# Altium PCB DRF1605_KIT.PcbDoc
Units mm, origin at the board's own origin, x right, y up, seen from the top; angles counter-clockwise.
Board outline 83 x 53 mm, 2 copper layers (Top Layer, Bottom Layer); 42 components, 37 nets, 220 pads, 27 vias.
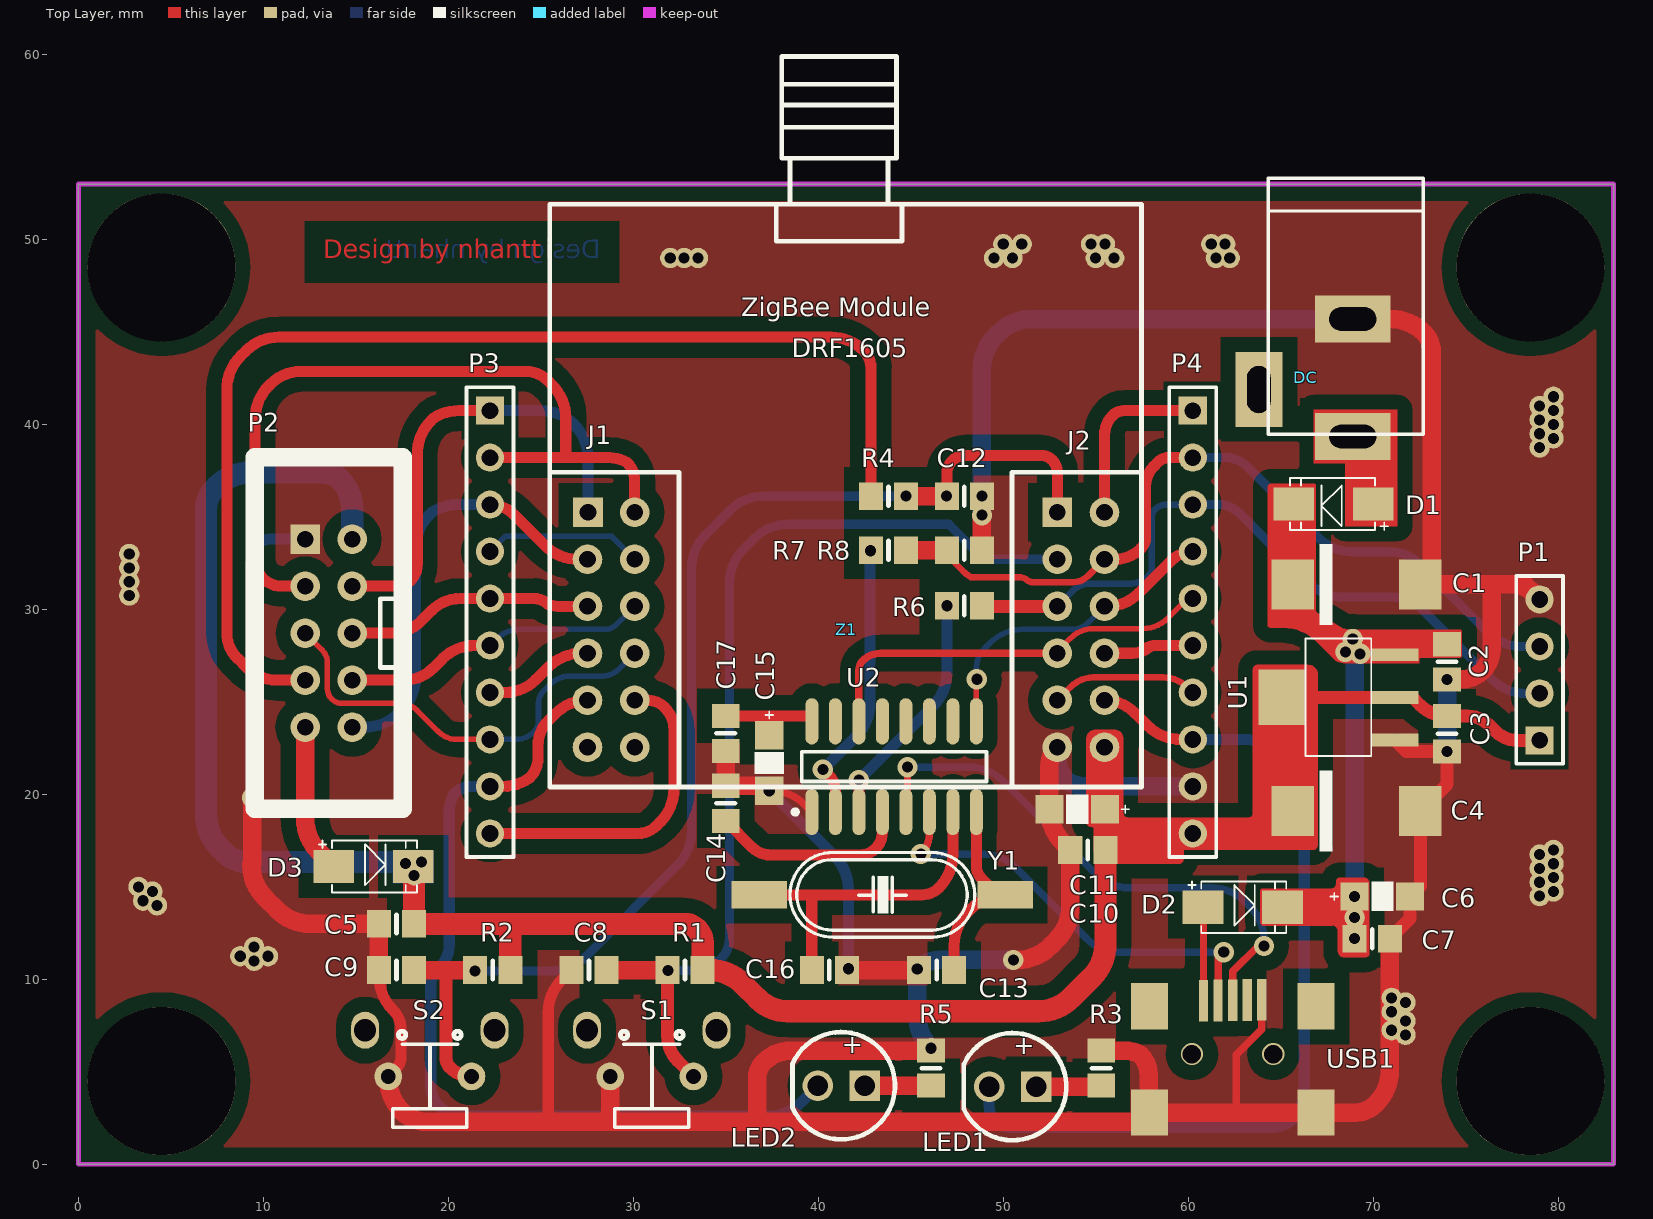
[diagram p0: Top Layer view]
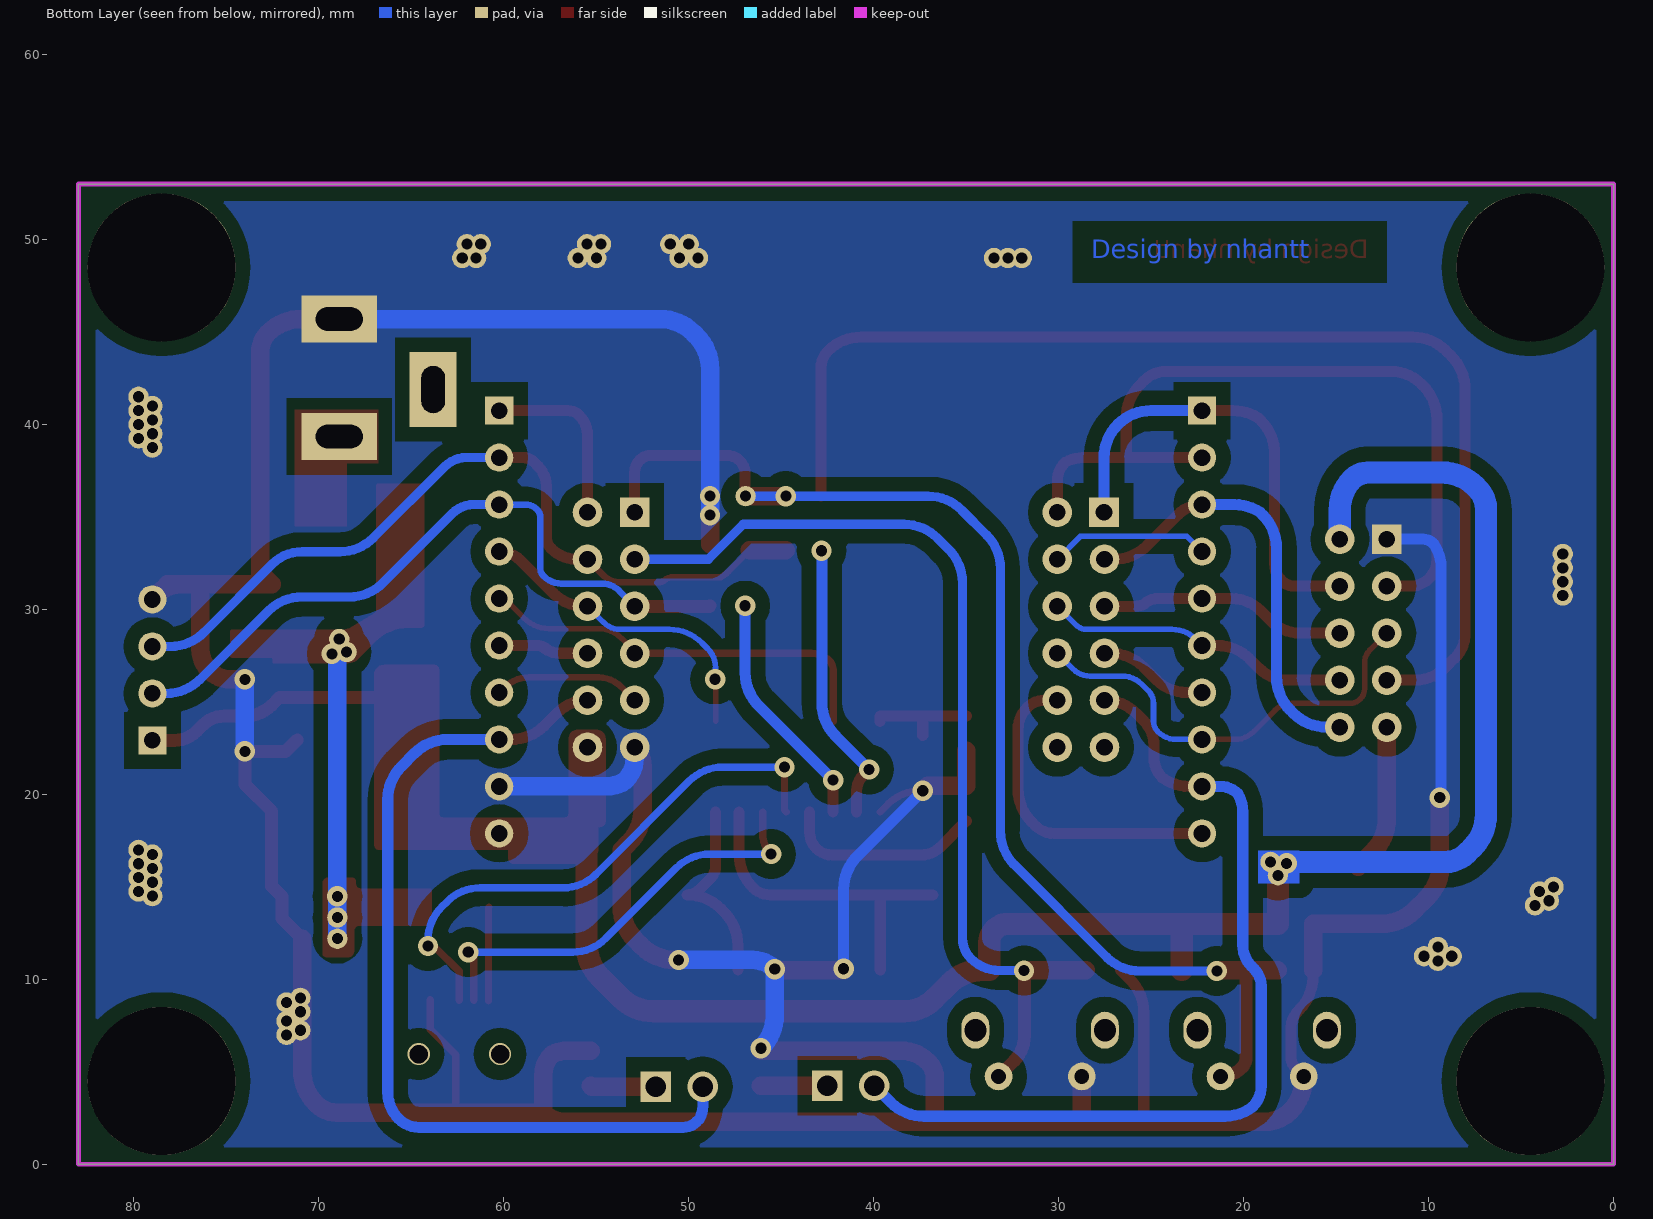
[diagram p1: Bottom Layer view, seen from below]

## Layer stack, top to bottom
Top Solder: solder mask 0.0102, Solder Resist, Dk 3.5
Top Layer: signal copper 0.0356
Dielectric 1: dielectric 0.32, FR-4, Dk 4.8
Bottom Layer: signal copper 0.0356
Bottom Solder: solder mask 0.0102, Solder Resist, Dk 3.5

## Board outline
0,0 83,0 83,53 0,53 0,0

## Design rules (kind name [scope] priority, off if disabled: settings)
Clearance Clearance_1 [InPolygon] p1: gap=0.8
Clearance [All] p2: gap=0.254
PolygonConnect [All] p1: connectstyle=Direct reliefconductorwidth=0.254 reliefentries=4 polygonreliefangle="90 Angle" airgapwidth=0.254
RoomDefinition DRF1605_KIT [InComponentClass('DRF1605_KIT')] p1: confinementstyle=ConfineIn formatcopy=TRUE lockcomponents=FALSE outline 85,3 314,3 314,47 85,47
RoutingVias [All] p1: holewidth=0.6 width=1.1 viastyle="Through Hole" minholewidth=0.6 minwidth=1.1 maxholewidth=0.6 maxwidth=1.1
SolderMaskExpansion [All] p1: expansion=0.102
Width [All] p1: maxlimit=2 minlimit=0.254 preferedwidth=0.7
30 further rules are at their usual default settings.

## Components (designator, comment, footprint, x,y, rotation, side; value= is the part's Value field where it differs from the comment)
C1 "Cap Pol3" "CAP TANTALUM 7343" 69.1,31.35 r0 top
C2 "100nF-16V-20%" C0805 74,27.169 r90 top
C3 "100nF-16V-20%" C0805 74,23.281 r90 top
C4 "220u, 16v" "CAP TANTALUM 7343" 69.1,19.1 r0 top
C5 "100nF" C0805 17.2,13 r0 top
C6 "10uF/50V" C1206 69.1,14.486 r0 top
C7 "100nF-16V-20%" C0805 69.95,12.2 r180 top
C8 "100nF-16V-20%" C0805 27.6,10.5 r0 top
C9 "100nF-16V-20%" C0805 17.2,10.5 r0 top
C10 "100nF" C0805 54.575,17 r0 top
C11 "10uF/50V" C1206 55.4,19.2 r180 top
C12 "1nF" C0805 47.9,36.125 r180 top
C13 "22p" C0805 46.4,10.5 r180 top
C14 "100nF" C0805 35,19.517 r270 top
C15 "10uF/50V" C1206 37.35,23.1 r270 top
C16 "22p" C0805 40.6,10.5 r0 top
C17 "100nF" C0805 35,23.3 r90 top
D1 "SS14" "DO-214AC (SMA)" 69.1,35.2 r180 top
D2 "SS14" "DO-214AC (SMA)" 61.703,14.4 r0 top
D3 "SS14" "DO-214AC (SMA)" 14.7,16.6 r0 top
DC "Jac DC" DC-IN 66.36,42.525 r270 top (schematic designator JDC1)
LED1 "Footprint" LedBlue5 50.512,4.2 r180 top
LED2 "Footprint" LedRed5 41.25,4.25 r180 top
P1 "Header 4" HDR1X4 79,22.92 r90 top
P2 "CABLE 10" "CABLE 10" 12.26,33.8 r270 top
P3 "Header 10" HDR1X10 22.25,40.75 r270 top
P4 "Header 10" HDR1X10 60.25,40.75 r270 top
R1 "10k" R0805 32.8,10.5 r180 top
R2 "10k" R0805 22.4,10.5 r180 top
R3 "1k" R0805 55.3,5.2 r90 top
R4 "10k" R0805 43.8,36.125 r180 top
R5 "1k" R0805 46.1,5.2 r90 top
R6 "470" R0805 47.9,30.2 r0 top
R7 "4k7" R0805 43.8,33.2 r0 top
R8 "10k" R0805 47.9,33.2 r180 top
S1 "SW-SMD" "Button Tactile Switch" 31,6 r0 top
S2 "SW-SMD" "Button Tactile Switch" 19,6 r0 top
U1 "LM1117-3.3V" LM1117-SOP 69.9,25.25 r90 top
U2 "CH340G" SOP-16 44.1,21.5 r90 top locked
USB1 "USB_M" USB_B_MINI_SMD 60.829,8.845 r180 top
Y1 "12MHz" "XT2 SMD" 43.5,14.568 r0 top
Z1 "ZigbeeDRF1605" DRF1605 41.5,28.9 r90 top locked

## Footprints (in the part's own frame and the unit in brackets; to place one, negate y for a bottom-side part, rotate by r counter-clockwise, add the part's x,y. Pads: shape width x height; smd on the part's side, far side on the other; paste and mask are expansions set on the pad)
"Button Tactile Switch" [mm]
  oval 1.5x2 hole 1.2: 0(-3.5,1.25) 0(3.5,1.25)
  round 1.5 hole 0.8: 1(-2.25,-1.25) 2(2.25,-1.25)
  silkscreen extent -2,-4 2,1.2, body extent -4.25,-4.85 4.25,3.05, height 7.4
C0805 [mm] "Chip Capacitor; Body 2.0 x 1.2 mm (LxW typ)"
  rect 1.3x1.5 smd: 1(0.95,0) 2(-0.95,0)
  silkscreen extent 0,-0.5 0,0.5, body extent -1.02,-0.64 0.98,0.62, height 0.78
C1206 [mil]
  rect 60x60 smd: 1(-3.93,0) 2(114.18,0)
  silkscreen extent -55,-31 79,31, body extent -8,-31 118,31, height 63
"CABLE 10" [mm] "Connector; Header; 5x2 Position"
  rect 1.6x1.6 hole 0.9: 1(0,0)
  round 1.6 hole 0.9: 2(0,2.54) 3(2.54,0) 4(2.54,2.54) 5(5.08,0) 6(5.08,2.54) 7(7.62,0) 8(7.62,2.54) 9(10.16,0) 10(10.16,2.54)
  silkscreen extent -4.42,-2.73 14.58,5.27, body extent -5.08,-3.3 15.24,5.84, height 9.86
"CAP TANTALUM 7343" [mm]
  rect 2.3x2.7 smd: 1(-3.45,0) 2(3.45,0)
  silkscreen extent -2,-2.2 -1.3,2.2, body extent -3.7,-2.22 3.7,2.22, height 3.01
DC-IN [mil] "Jac DC input"
  rect 100x160 hole 50 slot 100 at 90 deg: 1(125,100) 2(-125,100)
  rect 160x100 hole 50 slot 100 at 0 deg: 3(25,-100)
  silkscreen extent -425,-80 120,250, body extent -410,-105 134,269, height 434
"DO-214AC (SMA)" [mm]
  rect 2.2x1.8 smd: 1(-0.899,-0.5) 2(3.397,-0.5)
  silkscreen extent -1.7,-1.9 3.6,0.9, body extent -1.3,-1.8 3.9,0.8, height 2.3
DRF1605 [mm]
  rect 1.6x1.6 hole 0.9: 1(6.35,13.95) 13(6.35,-11.425)
  round 1.6 hole 0.9: 2(6.35,11.425) 3(3.81,13.975) 4(3.81,11.425) 5(1.27,13.975) 6(1.27,11.425) 7(-1.27,13.975) 8(-1.27,11.425) 9(-3.81,13.975) 10(-3.81,11.425) 11(-6.35,13.975) 12(-6.35,11.425) 14(6.35,-13.975) 15(3.81,-11.425) 16(3.81,-13.975) 17(1.27,-11.425) 18(1.27,-13.975) 19(-1.27,-11.425) 20(-1.27,-13.975) 21(-3.81,-11.425) 22(-3.81,-13.975) 23(-6.35,-11.425) 24(-6.35,-13.975)
  silkscreen extent -8.5,-15.97 31,16.02, body extent -7.87,-15.24 7.87,15.24, height 8.5
HDR1X4 [mil] "Connector; Header; 4 Position"
  rect 60x60 hole 35.43: 1(0,0)
  round 60 hole 35.43: 2(100,0) 3(200,0) 4(300,0)
  silkscreen extent -50,-50 350,50, body extent -50,-50 350,50, height 345
HDR1X10 [mil] "Connector; Header; 10 Position"
  rect 60x60 hole 35.43: 1(0,0)
  round 60 hole 35.43: 2(100,0) 3(200,0) 4(300,0) 5(400,0) 6(500,0) 7(600,0) 8(700,0) 9(800,0) 10(900,0)
  silkscreen extent -50,-50 950,50, body extent -50,-50 950,50, height 336
LedBlue5 [mil] "LedBlue5mm"
  rect 65x65 hole 43.31: 1(-50,0)
  round 65 hole 43.31: 2(50,0)
  silkscreen extent -114,-114 104,114, body extent -117,-118 96,119, height 347
LedRed5 [mil] "LedRed5mm"
  rect 65x65 hole 43.31: 1(-50,0)
  round 65 hole 43.31: 2(50,0)
  silkscreen extent -114,-114 104,114, body extent -118,-118 98,118, height 335
LM1117-SOP [mm]
  rect 0.7x2.54 smd: 1(-2.3,-1.27) 2(0,-1.27) 3(2.3,-1.27)
  rect 3x2.54 smd: 2(0,4.826)
  silkscreen extent -3.18,0 3.17,3.56, body extent -3.25,-1.78 3.25,5.18, height 1.68
R0805 [mm] "Chip Resistor; Body 2.0 x 1.2 mm (LxW typ)"
  rect 1.3x1.5 smd: 1(0.95,0) 2(-0.95,0)
  silkscreen extent 0,-0.5 0,0.5, body extent -1,-0.65 1,0.6, height 0.78
SOP-16 [mm] "16-Pin Small Outline Integrated Circuit 1.27 mm Pitch, IPC Low Density"
  oval 2.5x0.7 smd: 1(-2.45,4.445) 2(-2.45,3.175) 3(-2.45,1.905) 4(-2.45,0.635) 5(-2.45,-0.635) 6(-2.45,-1.905) 7(-2.45,-3.175) 8(-2.45,-4.445) 9(2.45,-4.445) 10(2.45,-3.175) 11(2.45,-1.905) 12(2.45,-0.635) 13(2.45,0.635) 14(2.45,1.905) 15(2.45,3.175) 16(2.45,4.445)
  silkscreen extent -2.57,-5 0.8,5.47, body extent -2.95,-5 2.96,4.98, height 1.45
USB_B_MINI_SMD [mm]
  rect 2x2.5 smd: 0(-6.075,0.305) 0(-6.071,6.045) 0(2.925,0.305) 0(2.929,6.045)
  rect 0.5x2.25 smd: 1(0,0) 2(-0.787,-0.013) 3(-1.575,-0.025) 4(-2.362,-0.038) 5(-3.15,-0.051)
  body extent -6.92,-0.37 3.78,8.83, height 3.95
"XT2 SMD" [mm] "Footpin for Crystal 2 pin"
  rect 3x1.5 smd: 1(-6.7,0) 2(6.6,0)
  silkscreen extent -5.03,-2.29 4.96,2.29, body extent -5.93,-2.36 5.42,2.29, height 3.5

## Part data
C1: "Polarized Capacitor (Surface Mount)"
C2 C3 C5 C7 C8 C9 C10 C12 C14 C17: library part Cap, "CAP CER 0.1UF 16V Y5V 0603"
C4: library part "Cap Pol3", "Polarized Capacitor (Surface Mount)"
C6 C11 C15: library part "Cap Semi", "Capacitor 100n 16V 0603"
C13 C16: library part "Cap Semi", "Capacitor (Semiconductor SIM Model)"
D1 D2 D3: library part "D Schottky", "Schottky Diode"
DC: library part DCIN, "Jac DC input"
LED1 LED2: library part Led, "LED"
P1: "Header, 4-Pin"
P2: "Header, 5-Pin, Dual row"
P3 P4: "Header, 10-Pin"
R1 R2 R3 R4 R5 R6 R7 R8: library part RM, "Resistor SMD"
S1 S2: "Switch"
U1: library part LM1117, "800mA Low-Dropout Linear Regulator"
U2: "CH340G USB to serial (UART) bridge"
Y1: library part XTAL, "Crystal Oscillator"
Z1: library part DRF1605

## Free pads (board coordinates)
  round 8 hole 8 unplated: 0(4.5,4.5) 0(4.5,48.5) 0(78.5,4.5) 0(78.5,48.5)
  round 1.1 hole 0.6: 2(18.15,15.625) 2(18.55,16.35) 3(46.925,36.125) 5(69,12.2) 6(68.9,28.4) 7(68.5,27.7) 8(69,13.343) 9(2.75,30.75) 9(2.75,31.5) 9(2.75,32.25) 9(2.75,33) 9(3.25,15) 9(3.5,14.25) 9(4,14.75) 9(4.25,14) 9(8.75,11.25) 9(9.5,11) 9(9.5,11.75) 9(10.25,11.25) 9(32,49) 9(32.75,49) 9(33.5,49) 9(49.5,49) 9(50,49.75) 9(50.5,49) 9(51,49.75) 9(54.75,49.75) 9(55,49) 9(55.5,49.75) 9(56,49) 9(61.25,49.75) 9(61.5,49) 9(62,49.75) 9(62.25,49) 9(71,7.25) 9(71,8.25) 9(71,9) 9(71.75,7) 9(71.75,7.75) 9(71.75,8.75) 9(79,14.5) 9(79,15.25) 9(79,16) 9(79,16.75) 9(79,38.75) 9(79,39.5) 9(79,40.25) 9(79,41) 9(79.75,14.75) 9(79.75,15.5) 9(79.75,16.25) 9(79.75,17) 9(79.75,39.25) 9(79.75,40) 9(79.75,40.75) 9(79.75,41.5)

## Via types
v1: diameter 1.1, hole 0.6, Top Layer to Bottom Layer, 25 vias
v2: diameter 1.2, hole 1, Top Layer to Bottom Layer, 2 vias

## Nets (pads, with @x,y where several pads share a name; then routed paths per layer and width w, separated by ;. In a path a pad name is that pad's centre, name@x,y a point inside that pad or via, vN(x,y) a via of type N, cw(c..) or ccw(c..) an arc to the next point about the centre after c; other vN are vias at no path point)
3V3: C3.1 C4.1 C5.1 C10.1 C11.1 D3.2 P1.1 P2.2 P4.10 pad.2 R1.2 R2.2 U1.2 Z1.24 | length 131.6
  Top Layer w0.7: U1.2@65.074,25.25 71.17,25.25 72.125,25.25 72.539,24.836 ; 72.54,24.835 ccw(c74,26.297) C3.1 75.114,24.231 cw(c75.114,22.589) 76.274,23.751 76.6,23.425 ccw(c77.819,24.644) 77.819,22.92 P1.1
  Top Layer w1.2: pad.2@18.15,15.625 C5.1 23.225,13 ; R2.2 23.35,12.875 23.225,13 ; Z1.24 55.475,17.05 C10.1 55.525,11.902 cw(c52.985,11.902) 54.781,10.106 53.694,9.019 cw(c51.898,10.815) 51.898,8.275 38.355,8.275 cw(c38.355,10.58) 36.726,8.949 cw(c38.355,10.58) 36.725,8.95 35.919,9.756 ccw(c34.123,7.96) 34.123,10.5 R1.2 33.75,12 ccw(c32.75,12) 32.75,13 23.225,13 ; C11.1 ccw(c56.81,19.2) 56.81,17.89 P4.10
  Top Layer w1.5: P4.10 63.388,17.89 ccw(c63.388,20.43) 65.184,18.634 C4.1 65.65,23.859 ccw(c63.683,23.859) U1.2@65.074,25.25
  Bottom Layer w1.2: P2.2 14.8,35.42 ccw(c12.495,35.42) 14.125,37.05 ccw(c13.28,36.205) 13.28,37.4 9.277,37.4 ccw(c9.277,34.86) 7.481,36.656 7.35,36.525 ccw(c8.436,35.439) 6.9,35.439 6.9,18.912 ccw(c9.44,18.912) 7.644,17.116 7.936,16.824 ccw(c9.08,17.967) 9.08,16.35 pad.2@18.55,16.35
  other v1: 17.675,16.275
5V: C1.1 C2.1 C6.1 C7.1 D1.2 D2.2 pad.5 pad.6 pad.7 pad.8 U1.3 | length 34.8
  Top Layer w1: D2.2 C6.1@68.414,13.9 ; C1.1@65.65,30.05 68.41,28.382 68.616,28.258 68.688,28.215 68.851,28.051 69.3,27.603 v1(69.3,27.6) 69.87,27.6 70.096,27.825 70.295,27.813 71.182,27.761 71.37,27.75 71.739,28.119 C2.1 ; pad.5 v1(69,14.486)
  Top Layer w1.5: C1.1 65.703,31.403 D1.2
  Bottom Layer w1: pad.5 pad.8 v1(69,14.486) 69,27.555 cw(c69.17,27.555) v1@69.05,27.675
CSN: P2.5 P3.8 Z1.8 | length 23.9
  Top Layer w0.3: P2.5 13.17,27.81 cw(c12.46,27.1) 13.464,27.1 13.464,25.7 ccw(c14.222,25.7) 13.686,25.164 ccw(c14.263,25.742) 14.263,24.925 17.377,24.925 cw(c17.377,23.602) 18.312,24.538 19.45,23.4 ccw(c20.488,24.438) 20.488,22.97 P3.8
  Bottom Layer w0.3: P3.8 23.612,22.97 ccw(c23.612,24.438) 24.65,23.4 ccw(c24.107,23.943) 24.875,23.943 24.875,24.918 cw(c25.857,24.918) 25.162,25.612 25.49,25.94 cw(c26.6,24.831) 26.6,26.4 28.3,26.4 ccw(c28.3,27.716) 29.23,26.785 Z1.8
CTS: P4.4 U2.9 Z1.18 | length 17.2
  Top Layer w0.3: U2.9 48.545,26.153 cw(c48.647,26.153) v1(48.575,26.225)
  Top Layer w0.6: Z1.18 55.623,30.17 ccw(c55.623,32.577) 57.324,30.874 ; 57.325,30.875 59.106,32.656 ; 59.107,32.657 cw(c60.25,31.512) P4.4
  Bottom Layer w0.3: v1(48.575,26.225) 48.575,26.824 48.55,26.849 cw(c50.001,26.849) 48.974,27.874 ; 48.975,27.875 49.3,28.2 ; 49.301,28.201 cw(c51.05,26.45) 51.05,28.925 53.7,28.925 ccw(c53.7,30.205) 54.604,29.299 ; 54.605,29.3 Z1.18
DEBUG_C: P2.3 P3.2 Z1.2 | length 43.5
  Top Layer w0.6: P2.3 10.977,31.26 cw(c10.977,32.677) 9.975,31.675 cw(c11.001,32.701) 9.55,32.701 9.55,40.298 cw(c12.09,40.298) 10.294,42.094 10.375,42.175 cw(c12.065,40.485) 12.065,42.875 24.168,42.875 cw(c24.168,41.168) 25.375,42.375 25.606,42.144 cw(c23.81,40.348) 26.35,40.348 26.35,38.21 ; P3.2 26.35,38.21 ; Z1.2 30.075,36.947 ccw(c28.67,36.947) 29.663,37.94 ccw(c28.708,36.383) 28.708,38.21 26.35,38.21
  Bottom Layer w0.35: P2.3 P2.3@12.46,31.26
DEBUG_D: P2.4 P3.1 Z1.1 | length 25.2
  Top Layer w0.6: P2.4 17.25,31.26 ccw(c17.25,32.25) 17.95,31.55 ccw(c17.045,32.455) 18.325,32.455 18.325,38.413 cw(c20.865,38.413) 19.069,40.209 19.212,40.352 cw(c20.577,38.21) 20.577,40.75 P3.1
  Bottom Layer w0.6: P3.1 24.998,40.75 cw(c24.998,38.21) 26.794,40.006 26.806,39.994 cw(c25.01,38.198) 27.55,38.198 Z1.1
GND: C1.2 C2.2 C3.2 C4.2 C5.2 C6.2 C7.2 C8.2 C9.2 C10.2 C11.2 C12.2 C13.1 C14.2 C15.2 C16.1 C17.2 DC.2 P1.4 P2.1 P4.9 pad.9 R3.1 R5.1 R8.2 S1.1 S2.1 U1.1 U2.1 USB1.0@57.9,2.8 USB1.0@66.9,2.8 USB1.5 Z1.23 | length 274.3
  Top Layer w0.4: v1(37.35,20.2) 37.453,20.2 cw(c37.453,17.66) 39.249,19.456 U2.1 ; 62.65,2.8 cw(c62.771,2.921) 62.6,2.921 62.6,5.925 63.979,7.304 USB1.5
  Top Layer w0.6: C9.2 16.25,10.152 ccw(c18.79,10.152) 16.994,8.356 17.008,8.342 ; S2.1 17.167,5.167 ccw(c16.484,5.85) 17.45,5.85 17.45,7.275 ccw(c15.941,7.275) 17.009,8.341 ; 25.425,2.3 25.4,2.325 25.4,8.198 cw(c27.94,8.198) 26.144,9.994 C8.2
  Top Layer w0.7: C7.2 72,13.3 C6.2 72.55,15.036 C4.2 74,20.55 v1(74,22.325) C3.2 71.789,22.331 U1.1
  Top Layer w1: v1(9.4,19.825) 9.4,16.252 9.35,16.202 ccw(c11.89,16.202) 10.094,14.406 10.756,13.744 ccw(c12.552,15.54) 12.552,13 C5.2 ; C9.2 C5.2@16.25,12.975 ; S2.1 16.75,4.652 ccw(c19.29,4.652) 17.494,2.856 ccw(c18.836,4.198) 18.836,2.3 25.425,2.3 28.725,2.3 ; S1.1 28.75,2.325 28.725,2.3 ; C17.2 C14.2 37.083,20.467 v1(37.35,20.2) ; C16.1@41.625,10.5 C13.1@45.35,10.5 ; R5.1 38.554,6.15 ccw(c38.554,4.028) 37.054,5.529 ccw(c37.907,4.675) 36.7,4.675 36.7,2.662 ccw(c37.212,2.662) 36.85,2.3 ; R8.2@48.85,33.525 v1(48.85,35.1) ; v1(50.55,11.05) 50.748,11.05 ccw(c50.748,13.59) 52.544,11.794 52.881,12.131 ccw(c51.085,13.927) 53.625,13.927 C10.2 53.244,17.381 cw(c55.04,19.177) 52.5,19.177 C11.2 52.5,21.524 cw(c53.951,21.524) Z1.23 ; R3.1 56.538,6.15 cw(c56.538,4.272) 57.406,5.938 cw(c56.293,4.826) 57.866,4.826 57.866,2.881 ccw(c57.981,2.881) USB1.0@57.9,2.8 ; DC.2 70.948,45.7 cw(c70.948,43.16) 72.744,44.956 cw(c71.703,43.915) 73.175,43.915 73.175,31.975 C1.2 76.4,31.35 ; C7.2 70.9,7 70.9,5.077 cw(c68.36,5.077) 70.156,3.281 70.125,3.25 cw(c69.039,4.336) 69.039,2.8 66.9,2.8 62.65,2.8 USB1.0@57.9,2.8 ; v1(74,26.219) 74.768,26.219 ccw(c74.768,27.851) 75.922,26.697 ccw(c74.768,27.851) 76.4,27.851 76.4,31.35 ; P1.4 P1.4@78.66,30.88 ; 28.725,2.3 36.85,2.3 ; 36.85,2.3 56.693,2.3 ccw(c56.693,4.007) USB1.0@57.9,2.8 ; 76.4,31.35 77.525,31.35 ; 77.525,31.35 cw(c77.525,29.745) P1.4@78.66,30.88 ; 77.525,31.35 78.19,31.35 P1.4@78.66,30.88
  Bottom Layer w0.6: v1(9.4,19.825) 9.325,19.9 9.325,32.291 cw(c11.459,32.291) 9.753,33.574 cw(c10.3,33.027) 10.3,33.8 P2.1 ; v1(37.35,20.2) 40.881,16.669 cw(c39.085,14.873) 41.625,14.873 v1(41.625,10.575)
  Bottom Layer w1: v1(46.1,6.275) 46.094,6.281 cw(c47.89,8.077) 45.35,8.077 v1(45.35,10.55) cw(c46.557,9.343) 46.557,11.05 v1(50.55,11.05) ; v1(48.85,35.1) v1(48.85,36.125) 48.85,42.998 cw(c51.39,42.998) 49.594,44.794 49.756,44.956 cw(c51.552,43.16) 51.552,45.7 DC.2 ; Z1.23 52.925,21.949 ccw(c54.616,21.949) 53.42,20.754 ccw(c54.455,22.247) 54.455,20.43 P4.9 ; v1(74,22.325) v1(74,26.219)
LED1: LED1.2 P4.8 Z1.22 | length 48.9
  Top Layer w0.6: Z1.22 cw(c55.475,22.772) 57.113,24.412 ; 57.114,24.411 57.811,23.714 ccw(c59.607,25.51) 59.607,22.97 P4.8
  Bottom Layer w0.6: LED1.2 49.242,3.135 ccw(c50.603,3.135) 49.426,2.451 49.575,2.302 ccw(c50.304,3.03) 50.304,2 64.589,2 ccw(c64.589,3.536) 65.675,2.45 ccw(c64.226,3.899) 66.275,3.899 66.275,19.723 ccw(c63.735,19.723) 65.531,21.519 64.824,22.226 ccw(c63.028,20.43) 63.028,22.97 P4.8
LED2: LED2.2 P3.9 Z1.9 | length 48.7
  Top Layer w0.6: P3.9 22.928,20.43 ccw(c22.928,22.97) 24.4,20.9 ccw(c23.313,21.987) 24.85,21.987 24.85,22.665 cw(c26.685,22.665) 25.387,23.962 25.801,24.376 cw(c27.525,22.652) Z1.9
  Bottom Layer w0.6: P3.9 21.255,20.43 ccw(c21.255,19.108) 20.32,20.043 ccw(c21.996,19.054) 20.124,19.587 ccw(c21.996,19.054) 20.102,19.499 ccw(c21.996,19.054) 20.05,19.054 20.05,11.864 cw(c18.386,11.864) 19.563,10.687 19.421,10.546 ccw(c20.317,9.65) 19.05,9.65 19.05,4.235 ccw(c20.638,4.235) 19.515,3.112 ccw(c21.018,5.062) 21.018,2.6 37.278,2.6 ccw(c37.278,5.14) 39.074,3.344 LED2.2
MISO: P2.10 P3.3 Z1.3 | length 23.6
  Top Layer w0.6: P3.3 cw(c22.25,33.847) 23.539,35.136 25.221,33.454 ccw(c27.017,35.25) 27.017,32.71 Z1.3
  Bottom Layer w0.6: P2.10 15.513,23.64 ccw(c15.513,26.18) 17.309,24.384 17.481,24.556 ccw(c15.685,26.352) 18.225,26.352 18.225,33.313 cw(c20.765,33.313) 18.969,35.11 19.12,35.26 cw(c20.503,33.13) 20.503,35.67 P3.3
MOSI: P2.8 P3.6 Z1.6 | length 16.6
  Top Layer w0.6: P2.8 17.636,26.18 ccw(c17.636,28.339) 19.163,26.813 19.675,27.325 ; 19.676,27.326 cw(c21.425,25.575) 21.425,28.05 P3.6
  Bottom Layer w0.3: P3.6 22.595,28.395 cw(c23.875,27.114) 23.875,28.925 28.475,28.925 ccw(c28.475,29.782) 29.081,29.176 Z1.6
NetC14_1: C14.1 U2.4 | length 11
  Top Layer w0.6: C14.1 36.43,17.137 ccw(c37.425,18.132) 37.425,16.725 42.255,16.725 ccw(c42.255,17.92) 43.1,17.075 ; 43.101,17.076 ccw(c42.219,17.956) 43.465,17.956 U2.4
NetD1_1: D1.1 DC.1 | length 4.1
  Top Layer w1.5: DC.1 69.999,38.251 D1.1
NetD2_1: D2.1 USB1.1 | length 5.1
  Top Layer w0.4: D2.1 60.829,13.875 USB1.1
NetD3_1: D3.1 P2.9 | length 8.1
  Top Layer w1: P2.9 12.26,18.693 ccw(c14.8,18.693) 13.004,16.897 D3.1
NetLED1_1: LED1.1 R3.2 | length 3.5
  Top Layer w1: LED1.1 55.25,4.2 R3.2
NetLED2_1: LED2.1 R5.2 | length 3.6
  Top Layer w1: LED2.1 R5.2
NetP2_7: P2.7 R4.1 | length 62.9
  Top Layer w0.6: P2.7 10.735,26.18 cw(c10.735,28.51) 9.087,26.863 8.588,27.362 cw(c9.945,28.72) 8.587,27.363 cw(c9.945,28.72) 8.025,28.72 8.025,41.898 cw(c10.565,41.898) 8.769,43.694 9.056,43.981 cw(c10.852,42.185) 10.852,44.725 40.673,44.725 cw(c40.673,42.185) 42.469,43.981 cw(c41.549,43.061) 42.85,43.061 R4.1
NetR6_2: R6.2 U2.3 | length 13
  Top Layer w0.6: U2.3 v1(42.195,20.77)
  Bottom Layer w0.6: v1(42.195,20.77) 46.206,24.781 ccw(c44.41,26.577) 46.95,26.577 v1(46.95,30.2)
NetR7_2: R7.2 U2.2 | length 15.3
  Top Layer w0.6: v1(40.25,21.35) 40.589,21.011 cw(c39.778,20.2) 40.925,20.2 U2.2
  Bottom Layer w0.6: v1(40.25,21.35) 42.056,23.156 ccw(c40.26,24.952) 42.8,24.952 42.8,33.15 v1(42.825,33.175)
P0.0: P4.1 Z1.14 | length 9.8
  Top Layer w0.6: Z1.14 55.475,39.414 cw(c57.011,39.414) 55.925,40.5 cw(c56.529,39.896) 56.529,40.75 P4.1
P0.6: P4.6 Z1.20 | length 5.3
  Top Layer w0.6: Z1.20 56.961,27.63 ccw(c56.961,29.064) 57.552,27.757 ; P4.6 58.258,28.05 ccw(c58.258,27.05) 57.907,27.986 ; 57.552,27.757 ccw(c56.961,29.064) 57.907,27.986 ; 57.552,27.757 cw(c58.258,27.05) 57.907,27.986
P0.7: P4.7 Z1.21 | length 8
  Top Layer w0.35: Z1.21 53.654,25.819 cw(c54.875,24.599) 54.875,26.325 58.625,26.325 cw(c58.625,24.369) 60.008,25.752 P4.7
P1.2: P3.10 Z1.10 | length 17.7
  Top Layer w0.6: P3.10 30.26,17.89 ccw(c30.26,19.29) 31.25,18.3 31.456,18.506 ccw(c29.66,20.302) 32.2,20.302 32.2,23.493 ccw(c30.493,23.493) 31.7,24.7 ccw(c30.758,23.758) 30.758,25.09 Z1.10
P1.3: P3.7 Z1.7 | length 5.9
  Top Layer w0.6: P3.7 23.062,25.51 ccw(c23.062,27.859) 24.723,26.198 25.411,26.886 cw(c27.207,25.09) 27.207,27.63 Z1.7
P1.5: P2.6 P3.5 Z1.5 | length 13.4
  Top Layer w0.6: P2.6 16.944,28.72 ccw(c16.944,30.956) 18.525,29.375 19.088,29.937 ; 19.088,29.938 cw(c20.663,28.362) 20.663,30.59 P3.5 24.626,30.59 cw(c24.626,29.491) 24.968,30.535 cw(c24.626,29.491) 25.403,30.268 ccw(c25.924,31.604) 25.924,30.17 Z1.5
P2.0: P3.4 Z1.4 | length 8.7
  Bottom Layer w0.3: P3.4 23.07,33.95 28.835,33.95 Z1.4
RESET: C9.1 C12.1 pad.3 R2.1 R4.2 S2.2 Z1.13 | length 67.8
  Top Layer w0.6: C12.1 46.95,37.326 cw(c47.974,37.326) 47.249,38.049 ; 47.25,38.05 cw(c47.914,37.386) 47.914,38.325 52.046,38.325 cw(c52.046,37.471) 52.65,38.075 cw(c51.986,37.411) 52.925,37.411 Z1.13
  Top Layer w0.7: 19.875,10.5 19.875,5.765 ccw(c20.635,5.765) 20.098,5.227 ccw(c21.25,6.38) S2.2
  Top Layer w1: C9.1 19.875,10.5 R2.1 v1(21.45,10.45) ; v1(44.75,36.125) pad.3 C12.1
  Bottom Layer w0.5: v1(21.45,10.45) 25.598,10.45 ccw(c25.598,12.99) 27.394,11.194 32.406,16.206 ccw(c30.61,18.002) 33.15,18.002 33.15,32.223 cw(c35.69,32.223) 33.894,34.019 35.256,35.381 cw(c37.052,33.585) 37.052,36.125 v1(44.75,36.125) pad.3
RTS: P4.5 U2.14 Z1.19 | length 22.4
  Top Layer w0.3: Z1.19 52.925,27.725 53.647,28.447 cw(c54.9,27.194) 54.9,28.966 57.533,28.966 ccw(c57.533,30.917) 58.913,29.538 59.965,30.59 P4.5
  Top Layer w0.4: U2.14 42.195,26.73 cw(c42.895,26.73) 42.4,27.225 cw(c43.378,26.247) 43.378,27.63 Z1.19
RX: P1.3 P4.2 R7.1 R8.1 Z1.16 | length 43.4
  Top Layer w0.35: R8.1@46.7,33.2 47.813,32.087 ; 47.813,32.087 ccw(c49.291,33.566) 48.255,31.75 50.786,31.75 cw(c50.786,30.811) 51.229,31.639 ccw(c51.625,32.035) 51.398,31.523 ccw(c51.625,32.035) 51.625,31.475 53.8,31.475 ccw(c53.8,32.537) 54.551,31.786 ; 54.551,31.786 Z1.16
  Top Layer w0.6: Z1.16 56.026,32.71 ccw(c56.026,34.724) 56.334,32.734 ccw(c56.026,34.724) 57.45,33.3 ccw(c56.846,33.904) 57.7,33.904 57.7,36.675 cw(c59.209,36.675) 58.141,37.741 58.362,37.962 cw(c58.96,37.365) 58.96,38.21 P4.2
  Top Layer w1: R7.1 R8.1@46.7,33.2
  Bottom Layer w0.5: P4.2 62.029,38.21 cw(c62.029,36.554) 63.2,37.725 67.056,33.869 ccw(c68.852,35.665) 68.852,33.125 70.9,33.125 cw(c70.9,30.832) 72.522,32.453 76.231,28.744 ccw(c78.027,30.54) 78.027,28 P1.3
SW1: C8.1 R1.1 S1.2 Z1.15 | length 53.2
  Top Layer w0.7: R1.1@31.85,10.475 31.85,6.95 ccw(c33.781,6.95) 32.416,5.584 S1.2
  Top Layer w1: C8.1 R1.1
  Bottom Layer w0.5: v1(31.875,10.475) 33.181,10.475 ccw(c33.181,12.694) 34.75,11.125 ccw(c33.664,12.211) 35.2,12.211 35.2,31.448 cw(c37.74,31.448) 35.944,33.244 36.556,33.856 cw(c38.352,32.06) 38.352,34.6 47.05,34.6 48.94,32.71 Z1.15
TX: P1.2 P4.3 R6.1 Z1.17 | length 38
  Top Layer w0.7: R6.1 48.88,30.17 Z1.17
  Bottom Layer w0.35: Z1.17 53.77,31.015 ; 53.77,31.015 cw(c54.7,30.084) 54.387,31.362 cw(c54.7,30.084) 54.7,31.4 56.884,31.4 ccw(c56.884,32.766) 57.85,31.8 ccw(c57.428,32.222) 58.025,32.222 58.025,34.978 cw(c58.622,34.978) 58.2,35.4 cw(c58.852,34.748) 58.852,35.67 P4.3
  Bottom Layer w0.5: P4.3 61.623,35.67 cw(c61.623,34.023) 62.787,35.188 66.556,31.419 ccw(c68.352,33.215) 68.352,30.675 70.923,30.675 cw(c70.923,28.135) 72.719,29.931 76.446,26.204 ccw(c78.242,28) 78.242,25.46 P1.2
USBDM: U2.6 USB1.2 | length 23.5
  Top Layer w0.4: v1(45.55,16.775) ccw(c44.452,17.873) 46.005,17.873 U2.6 ; USB1.2 61.617,11.167 v1(61.925,11.475)
  Bottom Layer w0.4: v1(45.55,16.775) 48.873,16.775 cw(c48.873,14.235) 50.669,16.031 54.481,12.219 ccw(c56.277,14.015) 56.277,11.475 v1(61.925,11.475)
USBDP: U2.5 USB1.3 | length 29.9
  Top Layer w0.4: U2.5 44.825,19.14 v1(44.825,21.475) ; USB1.3 62.404,10.429 63.775,11.8 v1(64.1,11.8)
  Bottom Layer w0.4: v1(44.825,21.475) 48.173,21.475 cw(c48.173,18.935) 49.969,20.731 55.006,15.694 ccw(c56.802,17.49) 56.802,14.95 61.273,14.95 cw(c61.273,12.41) 63.069,14.206 63.356,13.919 cw(c61.56,12.123) 64.1,12.123 v1(64.1,11.8)
VDD5V: C15.1 C17.1 U2.16 | length 6
  Top Layer w0.6: C17.1 37.325,24.25 ; C15.1 37.35,24.225 37.325,24.25 ; U2.16 39.655,24.25 37.325,24.25
XI: C16.2 U2.7 Y1.1 | length 18.2
  Top Layer w0.6: Y1.1 39.625,14.568 ; C16.2 39.65,14.543 39.625,14.568 ; U2.7 47.275,16.752 cw(c44.735,16.752) 46.531,14.956 46.525,14.95 cw(c45.603,15.872) 45.603,14.568 39.625,14.568
XO: C13.2 U2.8 Y1.2 | length 10.9
  Top Layer w0.6: C13.2 47.35,11.848 cw(c49.89,11.848) 48.094,13.644 48.274,13.824 cw(c50.07,12.028) 50.07,14.568 Y1.2 cw(c50.1,15.517) 49.429,14.846 48.85,15.425 cw(c49.586,16.161) 48.545,16.161 U2.8
pads on no net: DC.3 S1.0 S2.0 U2.10 U2.11 U2.12 U2.13 U2.15 USB1.0@57.904,8.54 USB1.0@66.904,8.54 USB1.4 Z1.11 Z1.12
copper on no net:
  other v2: 60.204,5.96 64.604,5.96

## Polygon pours and split planes (outlines as drawn)
GND on Bottom Layer "BOT-GND" (solid, pour order 0): 0,0 83,0 83,53 0,53 0,0
GND on Top Layer "TOP-GND" (solid, pour order 2): 0,0 83,0 83,53 0,53 0,0

## Keep-outs
Keep-Out Layer:
  the board outline again, w0.254

## Other copper
Top Layer:
  region net NetD1_1: 66.8,40.8 71.3,40.8 71.3,34.5 68.5,34.5 68.5,37.9 66.8,37.9
  region net 3V3: 66.5,27 cw(c66.5,26.5) 67,26.5 67,17.25 cw(c66.75,17.25) 66.75,17 59.75,17 cw(c59.75,17.25) 59.5,17.25 59.5,18.5 cw(c59.75,18.5) 59.75,18.75 63.25,18.75 ccw(c63.25,19) 63.5,19 63.5,26.75 cw(c63.75,26.75) 63.75,27
  region net 3V3: 55,23.5 56,23.5 cw(c56,23) 56.5,23 56.5,19 ccw(c56.75,19) 56.75,18.75 59.75,18.75 59.75,16.5 cw(c59.5,16.5) 59.5,16.25 55,16.25 55,18 ccw(c54.75,18) 54.75,18.25 cw(c54.75,18.5) 54.5,18.5 54.5,23 cw(c55,23)
  region net 5V: 67.7,14.9 ccw(c67.7,15.2) 68,15.2 68,15.3 cw(c68.2,15.3) 68.2,15.5 69.5,15.5 cw(c69.5,15.2) 69.8,15.2 69.8,11.4 cw(c69.6,11.4) 69.6,11.2 68.4,11.2 cw(c68.4,11.5) 68.1,11.5 68.1,12.6 ccw(c67.8,12.6) 67.8,12.9 64.1,12.9 cw(c64.1,13.1) 63.9,13.1 63.9,14.8 cw(c64,14.8) 64,14.9
  region net 5V: 66.8,36.8 cw(c66.8,36.7) 66.9,36.7 66.9,29.9 64.5,29.9 cw(c64.5,30.1) 64.3,30.1 64.3,36.6 cw(c64.5,36.6) 64.5,36.8
  region net 5V: 68.4,27.1 cw(c68.4,27.824) 67.888,27.312 66.944,28.256 ccw(c65.148,26.46) 65.148,29 64.5,29 cw(c64.5,29.241) 64.329,29.071 64.3,29.1 64.3,30.1 66.9,30.1 66.9,29.9 67.156,29.644 ccw(c68.952,31.44) 68.952,28.9 74.7,28.9 cw(c74.7,28.8) 74.8,28.8 74.8,27.5 cw(c74.7,27.5) 74.7,27.4 72.6,27.4 ccw(c72.6,27.3) 72.5,27.3 72.5,27.1 ccw(c72.417,-1450.514) 72.159,27.1
  text "Design by nhantt" at 13.25,49 h1
Bottom Layer:
  region net 3V3: 17,16.95 19.2,16.95 19.2,15.2 17,15.2
  text "Design by nhantt" at 28.25,49 h1

## Silkscreen, mask and mechanical layers (free items; w line width, h text height)
Mechanical 1:
  lines w0.254: 9,0 9,53 10,53 74,53 74,0 9,0

## Text inside footprints (layer, text, board x,y; h text height)
LED1: Top Overlay "+" at 51.705,6.816 h1 r180
LED2: Top Overlay "+" at 42.444,6.866 h1 r180
Z1: Top Overlay "DRF1605" at 38.575,43.625 h1; Top Overlay "ZigBee Module" at 35.85,45.85 h1; Top Overlay "J2" at 53.475,38.625 h1; Top Overlay "J1" at 27.55,38.925 h1